# EAGLE board snullv6 (EAGLE 7.2.0)
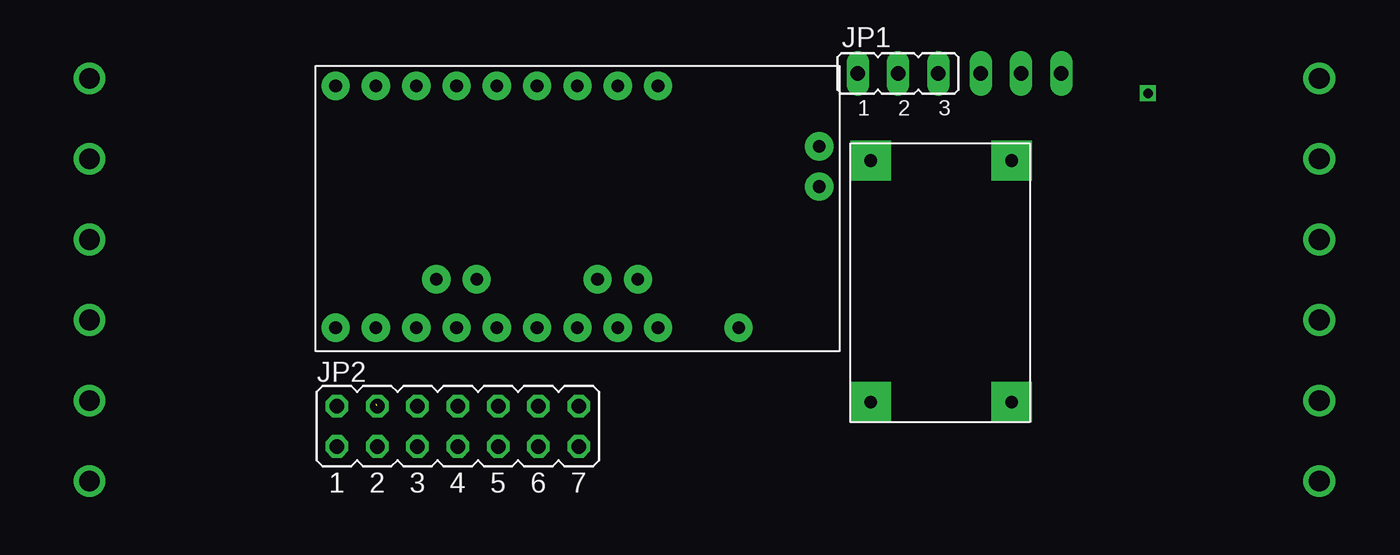
[diagram p0: board, top side]
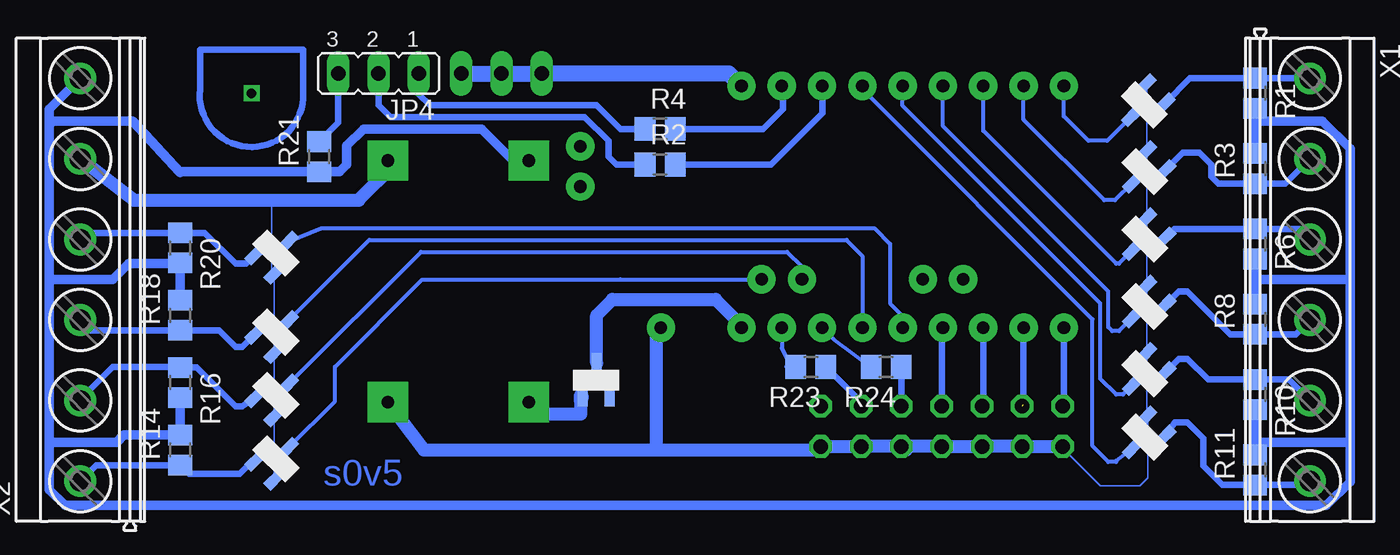
[diagram p1: board, bottom side, seen from below]

No outline drawn. Coordinates in mm, seen from the top.
Copper layers (1*16): Top 0.035mm / dielectric 1.5mm / Bottom 0.035mm
Design rules "default": minimum track width 10mil, minimum drill 24mil, track to track 8mil, track to pad 8mil, pad to pad 8mil, via to via 8mil, smd to smd 8mil, copper to edge 40mil, drill to drill 8mil, minimum pad ring 10mil, minimum via ring 8mil, stop-mask expansion 4mil, vias tented up to drill 0mil, thermal gap 10mil

## Footprints (pad centres in the part's own frame; a part is rotated, then mirrored left to right if it is on the bottom)
JP2 = drill 0.914 long: 1 -2.54,0; 2 0,0; 3 2.54,0
JP7Q = drill 0.914 octagon: 1 -7.62,-1.27; 2 -7.62,1.27; 3 -5.08,-1.27; 4 -5.08,1.27; 5 -2.54,-1.27; 6 -2.54,1.27; 7 0,-1.27; 8 0,1.27; 9 2.54,-1.27; 10 2.54,1.27; 11 5.08,-1.27; 12 5.08,1.27; 13 7.62,-1.27; 14 7.62,1.27
R0805 = smd 1.3 x 1.5: 1 -0.95,0; 2 0.95,0
ARDUINOPROMINIREDUCED = drill 0.8 pad 1.778: A0 16.51,-21.59; A1 16.51,-19.05; A2 16.51,-16.51; A3 16.51,-13.97; A4 13.462,-15.24; A5 13.462,-12.7; A6 13.462,-25.4; A7 13.462,-22.86; D2 1.27,-13.97; D3 1.27,-16.51; D4 1.27,-19.05; D5 1.27,-21.59; D6 1.27,-24.13; D7 1.27,-26.67; D8 1.27,-29.21; D9 1.27,-31.75; D10 16.51,-31.75; D11 16.51,-29.21; D12 16.51,-26.67; D13 16.51,-24.13; GND 5.08,-1.27; GND1 1.27,-11.43; GND2 16.51,-6.35; VCC 7.62,-1.27; VCC2 16.51,-11.43
VREGMODULE = drill 0.8 pad 2.54 square: GNDIN 16.51,-10.16; GNDOUT 1.27,-10.16; VIN 16.51,-1.27; VOUT 1.27,-1.27
MOSFET-TO236 = smd 0.635 x 1.27: D 1.5,1.73; G 0.6,-0.37; S 2.3,-0.37
MKDSN1,5/6-5,08 = drill 1.3 pad 2: 1 -12.7,0.025; 2 -7.62,0.025; 3 -2.54,0.025; 4 2.54,0.025; 5 7.62,0.025; 6 12.7,0.025

## Placement (x,y rotation side)
JP1  [JP2]  54.75,28.25 0 top
JP2  [JP7Q]  27,6 0 top
JP4  [JP2]  62.5,28.25 180 bottom
R1  [R0805]  7.25,27 270 bottom
R2  [R0805]  44.75,22.5 0 bottom
R3  [R0805]  7.25,22.25 90 bottom
R4  [R0805]  44.75,24.75 0 bottom
R6  [R0805]  7.25,17.5 270 bottom
R8  [R0805]  7.25,12.75 90 bottom
R10  [R0805]  7.25,8 270 bottom
R11  [R0805]  7.25,3.25 90 bottom
R14  [R0805]  75,4.5 90 bottom
R16  [R0805]  75,8.75 270 bottom
R18  [R0805]  75,13 90 bottom
R20  [R0805]  75,17.25 270 bottom
R21  [R0805]  66.25,23 90 bottom
R23  [R0805]  35.25,9.75 180 bottom
R24  [R0805]  30.5,9.75 180 bottom
U$1  ARDUINOPROMINIREDUCED  [ARDUINOPROMINIREDUCED]  51.05,28.73 270 top
U$2  VREGMODULE  [VREGMODULE]  51.75,6.25 90 top
U$3  MOSFET-TO236  [MOSFET-TO236]  12.75,25.7 135 bottom
U$4  MOSFET-TO236  [MOSFET-TO236]  12.7,21.5 135 bottom
U$5  MOSFET-TO236  [MOSFET-TO236]  12.7,17.25 135 bottom
U$6  MOSFET-TO236  [MOSFET-TO236]  12.7,13 135 bottom
U$7  MOSFET-TO236  [MOSFET-TO236]  12.7,8.75 135 bottom
U$8  MOSFET-TO236  [MOSFET-TO236]  12.7,4.75 135 bottom
U$9  MOSFET-TO236  [MOSFET-TO236]  70.45,4.5 315 bottom
U$10  MOSFET-TO236  [MOSFET-TO236]  70.45,8.5 315 bottom
U$11  MOSFET-TO236  [MOSFET-TO236]  70.45,12.5 315 bottom
U$12  MOSFET-TO236  [MOSFET-TO236]  70.45,17.5 315 bottom
U$13  MOSFET-TO236  [MOSFET-TO236]  50.25,8.25 0 bottom
X1  MKDSN1,5/6-5,08  [MKDSN1,5/6-5,08]  3.81,15.24 270 bottom
X2  MKDSN1,5/6-5,08  [MKDSN1,5/6-5,08]  81.28,15.24 90 bottom

## Library data of the parts
JP1 JP2 JP4 = jumper
R1-R4 R6 R8 R10 R11 R14 R16 R18 R20 R21 R23 R24 = resistor
U$1-U$13 = snulllib
X1 X2 = con-phoenix-508

## Nets
N$1: R14.1 U$9.G X2.1
N$2: R10.1 U$7.G X1.5
N$3: JP2.2 U$1.D10
N$4: R16.1 U$10.G X2.2
N$5: R18.1 U$11.G X2.3
N$6: JP2.4 U$1.D11
N$7: JP2.6 U$1.D12
N$8: U$1.D8 U$4.D
N$9: JP2.8 U$1.D13
N$10: U$1.D9 U$3.D
N$12: U$1.VCC2 U$13.D
N$13: U$1.A5 U$9.D
N$14: U$1.D6 U$6.D
N$15: U$1.D5 U$7.D
N$16: U$1.A4 U$10.D
N$17: U$1.D4 U$8.D
N$18: U$1.D7 U$5.D
N$19: U$2.VOUT U$13.G
N$20: JP2.10 R24.1
N$21: U$1.A0 U$12.D
N$22: R1.1 U$3.G X1.1
N$23: R3.1 U$4.G X1.2
N$24: U$1.A1 U$11.D
N$25: R6.1 U$5.G X1.3
N$27: R8.1 U$6.G X1.4
N$28: R11.1 U$8.G X1.6
N$29: JP4.3 R21.2
N$30: R20.1 U$12.G X2.4
N$31: JP2.1 JP2.3 JP2.5 JP2.7 JP2.9 JP2.11 JP2.13 U$1.GND2 U$2.GNDOUT U$3.S U$4.S U$5.S U$6.S U$7.S U$8.S
N$32: JP1.1 JP1.2 JP1.3 U$1.GND1
N$33: JP4.1 R4.1
N$34: JP4.2 R2.1
N$35: R2.2 U$1.D3
N$36: JP2.12 R23.1
N$37: R4.2 U$1.D2
N$38: R23.2 U$1.A3
N$39: R24.2 U$1.A2
VCC: R1.2 R3.2 R6.2 R8.2 R10.2 R11.2 R14.2 R16.2 R18.2 R20.2 R21.1 U$2.VIN X2.6
VDD: U$2.GNDIN U$9.S U$10.S U$11.S U$12.S X2.5

## Tracks (layer width: path | path; a pad name or v marks a point on that pad's centre or on a via)
N$1
  Bottom 0.406: X2.1 80.3,3.55 R14.1 74.45,3 71.25,3 70.44,3.81 U$9.G
N$2
  Bottom 0.406: X1.5 5.12,8.95 R10.1 10.2,8.95 11.5,10.25 12.05,10.25 U$7.G
N$3
  Bottom 0.406: JP2.2 19.3,7.35 U$1.D10
N$4
  Bottom 0.406: X2.2 81.31,7.7 79.25,9.75 75.05,9.75 R16.1 73.95,9.7 71.5,7.25 71.1,7.25 U$10.G
N$5
  Bottom 0.406: X2.3 80.66,12.05 R18.1 72.55,12.05 71.5,11 71.1,11 U$11.G
N$6  (1 unrouted)
  Bottom 0.406: 21.84,7.37 U$1.D11
N$7
  Bottom 0.406: JP2.6 24.38,7.35 U$1.D12
N$8
  Bottom 0.254: U$4.D 16.07,20.25 16.75,20.25 21.84,25.34 U$1.D8
N$9
  Bottom 0.406: U$1.D13 27,12.14 JP2.8
N$10
  Bottom 0.254: U$3.D 16.57,24 17.75,24 19.3,25.55 U$1.D9
N$12
  Bottom 0.813: U$13.D 48.75,13 47.75,14 41.25,14 39.62,12.37 U$1.VCC2
N$13
  Bottom 0.254: U$1.A5 47.27,15.27 49.25,15.25 59.75,15.25 65.25,9.75 65.25,7.58 U$9.D
N$14
  Bottom 0.254: U$6.D 15.82,12 16.25,12 16.5,12.25 16.5,14.5 26.92,24.92 U$1.D6
N$15
  Bottom 0.254: U$7.D 15.57,8 16,8 17,9 17,13.75 29.46,26.21 U$1.D5
N$16
  Bottom 0.254: U$10.D 59.83,17 36.75,17 35.81,16.06 U$1.A4
N$17
  Bottom 0.254: U$8.D 16,3.82 16,3.75 16.5,3.75 17.5,4.75 17.5,12.75 32,27.25 U$1.D4
N$18
  Bottom 0.254: U$5.D 15.82,16.25 16,16.25 24.38,24.63 U$1.D7
N$19
  Bottom 0.813: 53.79,7.5 U$2.VOUT 53.77,7.27 53,6.75 49.75,6.75 49.75,7.53 | U$13.G 49.75,7.53 | 49.75,7.53 49.75,8
N$20
  Bottom 0.406: R24.1 JP2.10
N$21
  Bottom 0.254: U$12.D 66.08,18.5 31.25,18.5 30.25,17.5 30.25,13.75 29.46,12.96 U$1.A0
N$22
  Bottom 0.406: X1.1 R1.1 11.35,27.95 U$3.G
N$23
  Bottom 0.406: X1.2 5.34,21.3 R3.1 9.55,21.3 10,21.75 10,22.5 10.75,23.25 11.8,23.25 U$4.G
N$24
  Bottom 0.254: U$11.D 63.08,17.75 33,17.75 32,16.75 U$1.A1
N$25
  Bottom 0.406: X1.3 4.46,18.45 R6.1 12.35,18.45 U$5.G
N$26
  Bottom 0.406: 67.25,29.75 67.25,27 arc189 73.75,27.25 73.75,29.75 67.25,29.75
N$27
  Bottom 0.406: X1.4 4.68,11.8 R8.1 8.8,11.8 11.5,14.5 12.05,14.5 U$6.G
N$28
  Bottom 0.406: X1.6 4.03,2.3 R11.1 9.3,2.3 10.5,3.5 10.5,5.25 11.5,6.25 12.3,6.25 U$8.G
N$29
  Bottom 0.406: R21.2 65.04,25.16 JP4.3
N$30
  Bottom 0.406: X2.4 81.31,18.2 R20.1 73.45,18.2 71.5,16.25 70.85,16.25 U$12.G
N$31
  Bottom 0.1: 19.5,4.73 17,2.25 14.5,2.25 14,2.75 14,6.57 U$8.S U$7.S U$6.S U$5.S U$4.S 14.06,27.54 U$3.S
  Bottom 0.813: JP2.9 29.31,4.5 29.25,4.5 29.48,4.73 JP2.9 | JP2.9 JP2.11 JP2.13 34.85,4.5 45,4.5 | JP2.9 JP2.7 JP2.5 JP2.3 19.5,4.73 JP2.1 | U$2.GNDOUT 59.64,4.5 45,4.5 | U$1.GND2 45,11.92 45,4.5
N$32
  Bottom 1.016: U$1.GND1 40.41,28.25 JP1.1 54.25,28.25 JP1.2 JP1.3
N$33
  Bottom 0.406: R4.1 47.25,24.75 48.75,26.25 59.25,26.25 59.96,26.96 JP4.1
N$34
  Bottom 0.406: R2.1 47.5,22.5 48,23 48,24 49.5,25.5 61.75,25.5 62.5,26.25 JP4.2
N$35
  Bottom 0.406: U$1.D3 34.5,27.42 34.5,25.75 37.75,22.5 R2.2
N$36
  Bottom 0.406: R23.1 32.08,7.53 JP2.12
N$37
  Bottom 0.406: U$1.D2 37,27.38 37,26 38.25,24.75 R4.2
N$38
  Bottom 0.254: U$1.A3 37.08,10.92 36.5,9.75 | 36.8,9.75 36.5,9.75 | 36.5,9.75 R23.2
N$39
  Bottom 0.254: U$1.A2 33.8,11.48 R24.2
N$46  (via drill 0.6)
  other vias: 70.5,27
VCC
  Bottom 0.406: X2.6 81.14,27.77
  Bottom 0.61: 83.25,15.25 79.25,15.25 78.25,16.25 75.05,16.25 R20.2 R18.2 | X2.6 83.25,26 83.25,25 | 83.25,5 79,5 78.55,5.45 R14.2 R16.2 | 83.25,5 83.25,15.25 | 83.25,15.25 83.25,25 | 83.25,5 83.25,2 82.25,1 2.75,1 1.25,2.5 1.25,5 | 1.25,5 1.25,15.25 | 1.25,15.25 1.25,23.5 3,25.25 7.25,25.25 R1.2 R3.2 | R8.2 R6.2 7.25,15.25 1.25,15.25 | 7.25,5 R10.2 | R11.2 7.25,5 | 7.25,5 1.25,5 | 83.25,25 83,25.25 78,25.25 75,22 74.95,22.05 R21.1 64.95,22.05 64.5,22.5 64.5,23.7 63.45,24.75 56,24.75 54.01,22.76 U$2.VIN
VDD
  Bottom 0.1: U$9.S U$10.S U$11.S 69.08,15.11 | U$12.S 69.08,15.11 | 69.08,15.11 69.25,15.28 69.25,20.25
  Bottom 0.406: 81.25,22.8 arc-90 X2.5
  Bottom 0.813: U$2.GNDIN 61.75,22.67 61.5,22.5 63.75,20.25 69.25,20.25 77.94,20.25 81.25,22.8

## Text on the board
Bottom: s0v5